# Altium PCB MAGIsCoCore.PcbDoc
Units mil, origin at the board's own origin, x right, y up, seen from the top; angles counter-clockwise.
Board outline 6000 x 4000 mil, 2 copper layers (Top Layer, Bottom Layer); 7 components, 24 nets, 58 pads, 14 vias.
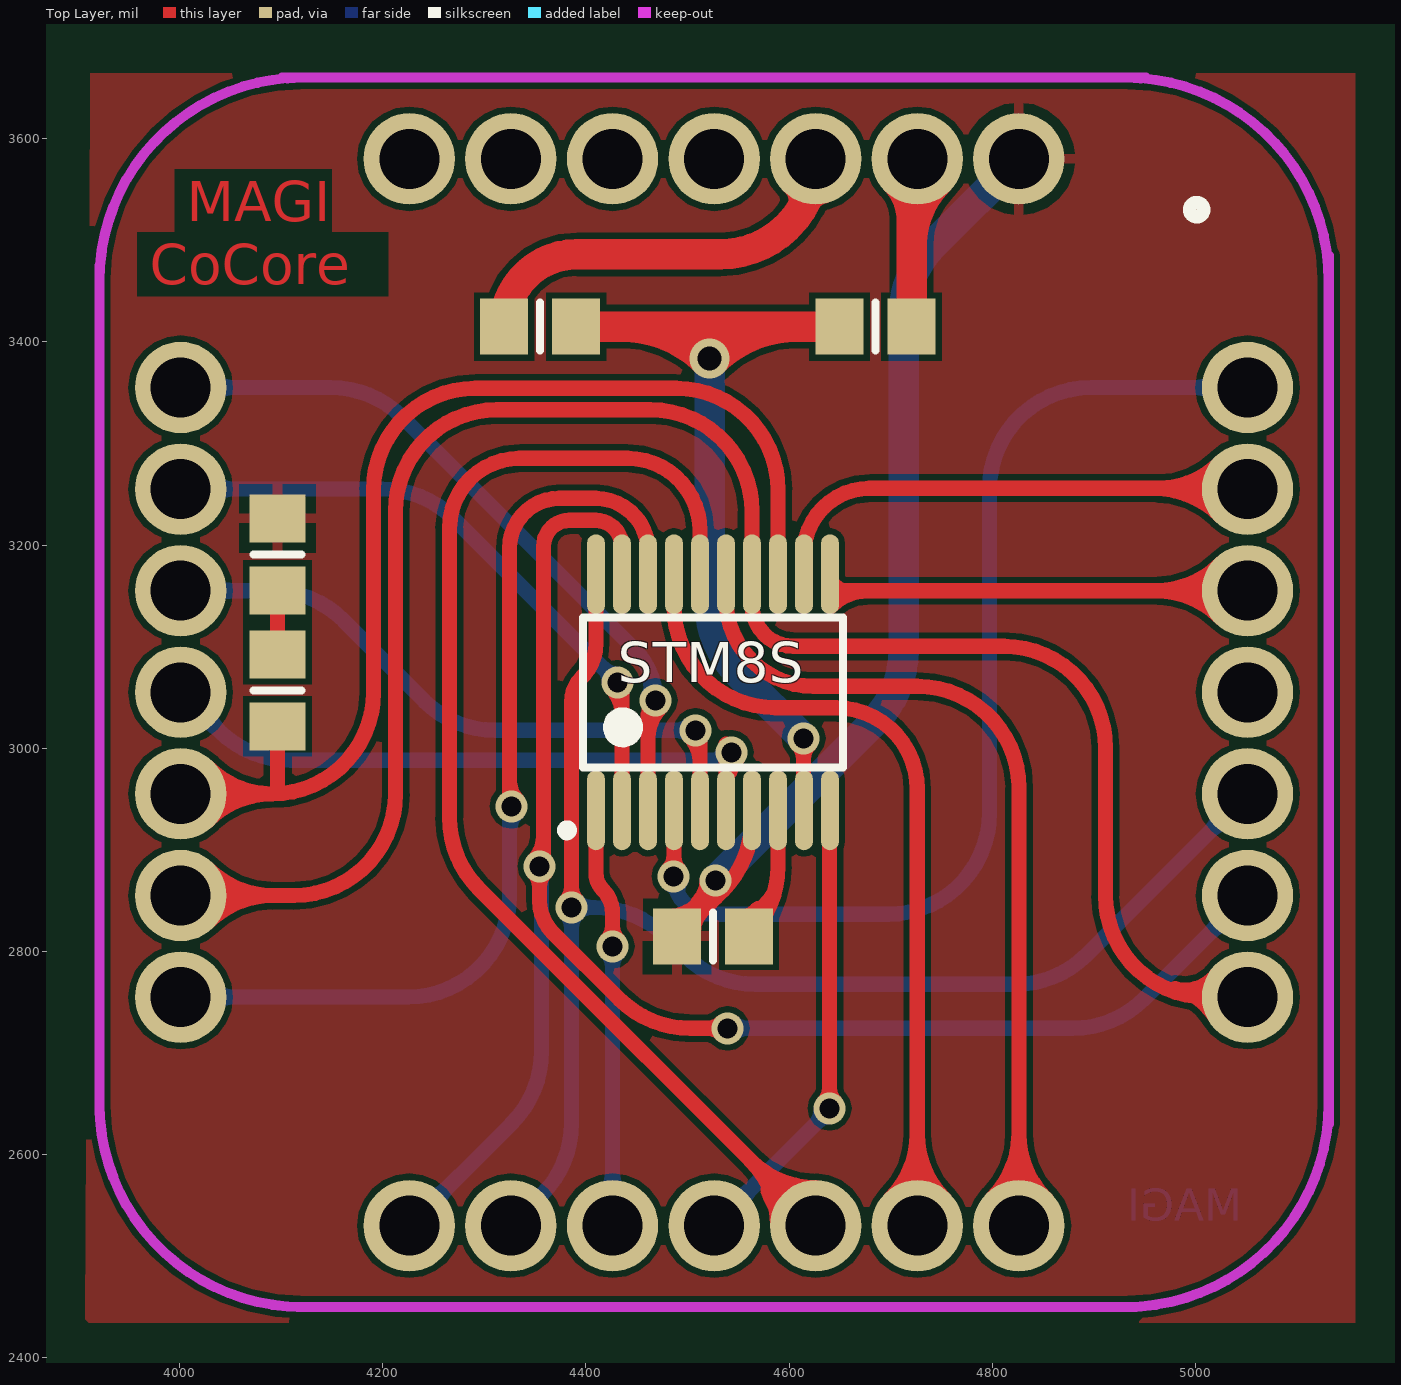
[diagram p0: Top Layer view]
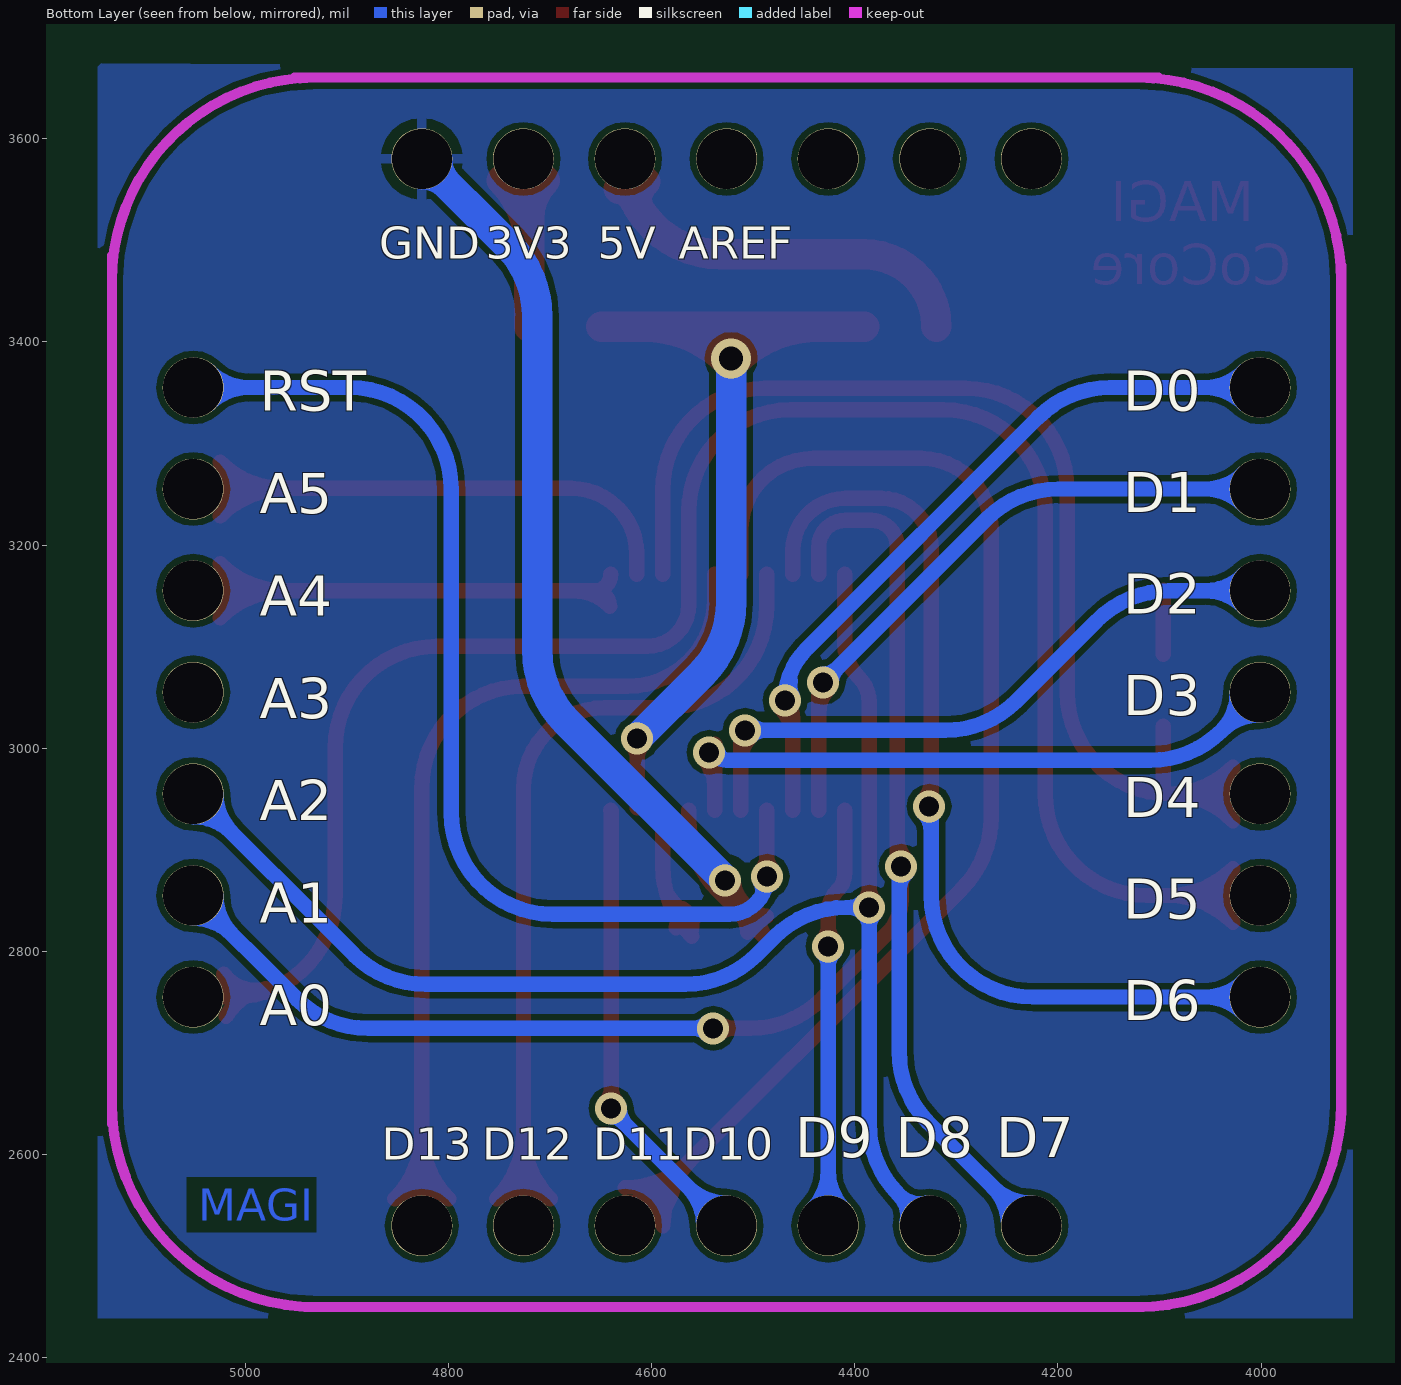
[diagram p1: Bottom Layer view, seen from below]

## Layer stack, top to bottom
Top Solder: solder mask 0.4, Solder Resist, Dk 3.5
Top Layer: signal copper 1.4
Dielectric 1: dielectric 12.6, FR-4, Dk 4.8
Bottom Layer: signal copper 1.4
Bottom Solder: solder mask 0.4, Solder Resist, Dk 3.5

## Board outline
1000,1000 7000,1000 7000,5000 1000,5000

## Design rules (kind name [scope] priority, off if disabled: settings)
Clearance [All] p1: gap=6
PolygonConnect [All] p1: connectstyle=Relief reliefconductorwidth=10 reliefentries=4 polygonreliefangle="90 Angle" airgapwidth=10
RoutingVias [All] p1: holewidth=280 width=500 viastyle="Through Hole" minholewidth=12 minwidth=24 maxholewidth=28 maxwidth=50
SolderMaskExpansion [All] p1: expansion=4
Width [All] p1: maxlimit=100 minlimit=6 preferedwidth=30
29 further rules are at their usual default settings.

## Classes and differential pairs
component class MAGIsCoCore: C4 J1 R2 R3 U1

## Components (designator, comment, footprint, x,y, rotation, side; value= is the part's Value field where it differs from the comment)
C4 "CAP_1" 6-0805_N 4525,2815 r0 top
J1 "MAGI-M8" MAGI-M8 4526.14,3055.16 r0 top
LED3 "LED_3" 6-0805_N 4096.46,3190.94 r90 top
R2 "000" 6-0805_n 4685,3415 r180 top
R3 "000" 6-0805_n 4355,3415 r180 top
R8 "RES1_1" 6-0805_N 4096.46,3057.09 r270 top
U1 "STM8S003F3" STM8S003F3 4525,3055.16 r90 top

## Footprints (in the part's own frame and the unit in brackets; to place one, negate y for a bottom-side part, rotate by r counter-clockwise, add the part's x,y. Pads: shape width x height; smd on the part's side, far side on the other; paste and mask are expansions set on the pad)
6-0805_N [mm] "Chip Resistor, Body 2.0x1.2mm, IPC Medium Density"
  rect 1.2x1.4 smd: 1(-0.9,0) 2(0.9,0)
  silkscreen extent 0,-0.6 0,0.6, body extent -1.07,-0.7 1.07,0.7, height 0.7
6-0805_n [mm] "Chip Resistor, Body 2.0x1.2mm, IPC Medium Density"
  rect 1.2x1.4 smd: 1(-0.9,0) 2(0.9,0)
  silkscreen extent 0,-0.6 0,0.6, body extent -1.07,-0.7 1.07,0.7, height 0.7
MAGI-M8 [mil]
  round 90 / inner round 90 / far side round 60 hole 59.06: 1(300,525) 2(200,525) 3(100,525) 4(0,525) 5(-100,525) 6(-200,525) 7(-300,525) 8(-525,300) 9(-525,200) 10(-525,100) 11(-525,0) 12(-525,-100) 13(-525,-200) 14(-525,-300) 15(-300,-525) 16(-200,-525) 17(-100,-525) 18(0,-525) 19(100,-525) 20(200,-525) 21(300,-525) 22(525,-300) 23(525,-200) 24(525,-100) 25(525,0) 26(525,100) 27(525,200) 28(525,300)
  Keep-Out Layer lines w10: -605,-415 -605,290 -605,420 ; -605,-405 ccw(c-405,-405) -405,-605 ; -605,405 cw(c-405,405) -405,605 ; -425,605 425,605 ; -410,-605 415,-605 ; 405,-605 ccw(c405,-405) 605,-405 ; 405,605 cw(c405,405) 605,405 ; 605,-425 605,430
  silkscreen extent 468,468 482,482
STM8S003F3 [mm]
  oval 2x0.45 smd: 1(-2.95,2.925) 2(-2.95,2.275) 3(-2.95,1.625) 4(-2.95,0.975) 5(-2.95,0.325) 6(-2.95,-0.325) 7(-2.95,-0.975) 8(-2.95,-1.625) 9(-2.95,-2.275) 10(-2.95,-2.925) 11(2.95,-2.925) 12(2.95,-2.275) 13(2.95,-1.625) 14(2.95,-0.975) 15(2.95,-0.325) 16(2.95,0.325) 17(2.95,0.975) 18(2.95,1.625) 19(2.95,2.275) 20(2.95,2.925)
  silkscreen extent -3.57,-3.25 1.88,3.77

## Part data
C4: "Capacitor"
R2 R3: library part RES1

## Via types
v1: diameter 31.5, hole 19.68, Top Layer to Bottom Layer, 13 vias
v2: diameter 39.37, hole 23.62, Top Layer to Bottom Layer, 1 vias

## Nets (pads, with @x,y where several pads share a name; then routed paths per layer and width w, separated by ;. In a path a pad name is that pad's centre, name@x,y a point inside that pad or via, vN(x,y) a via of type N, cw(c..) or ccw(c..) an arc to the next point about the centre after c; other vN are vias at no path point)
3.3V: J1.2 R2.1 | length 396
  Top Layer w30: R2.1 4720.43,3574.45 cw(c4726.14,3574.45) J1.2 ; J1.2@4704.93,3558.94 cw(c4667.5,3521.51) 4720.43,3521.51 ccw(c4667.5,3521.51) J1.2@4704.93,3558.94 ; 4720.43,3493.95 cw(c4812.35,3493.95) 4747.35,3558.94 ccw(c4812.35,3493.95) 4720.43,3493.95
5V: J1.3 R3.2 | length 508.8
  Top Layer w30: R3.2 cw(c4390.79,3415) 4390.79,3486.22 4532.2,3486.22 ccw(c4532.2,3580.16) J1.3 ; 4613.56,3533.19 ccw(c4589.98,3539.51) 4606.2,3557.74 cw(c4589.98,3539.51) 4613.56,3533.19 ; 4613.56,3533.19 cw(c4637.13,3526.87) 4632.2,3550.78 ccw(c4637.13,3526.87) 4613.56,3533.19
A0: J1.13 J1.22 U1.14 | length 2580.6
  Top Layer w15: J1.13 4112.53,2855.16 ccw(c4112.53,2955.16) 4212.53,2955.16 4212.53,3233.33 cw(c4312.53,3233.33) 4312.53,3333.33 4463.39,3333.33 cw(c4463.39,3233.33) 4563.39,3233.33 U1.14 4563.39,3141.34 ccw(c4604.33,3141.34) 4604.33,3100.39 4811.42,3100.39 cw(c4811.42,3000.39) 4911.42,3000.39 4911.42,2855.16 ccw(c5011.42,2855.16) 5011.42,2755.16 J1.22 ; 4055.46,2855.16 ccw(c4055.46,2800.84) 4017.05,2839.25 cw(c4055.46,2800.84) 4055.46,2855.16 ; 4055.46,2855.16 cw(c4055.46,2909.48) 4017.05,2871.07 ccw(c4055.46,2909.48) 4055.46,2855.16 ; 4091.67,2855.16 ccw(c4091.67,2764.62) 4027.66,2828.64 cw(c4091.67,2764.62) 4091.67,2855.16 ; 4091.67,2855.16 cw(c4091.67,2945.69) 4027.66,2881.67 ccw(c4091.67,2945.69) 4091.67,2855.16 ; 4980.11,2763.29 ccw(c4989.92,2801.05) 5021.14,2777.65 cw(c4989.92,2801.05) 4980.11,2763.29 ; 4984.34,2762.19 cw(c4970.15,2707.56) 5018.81,2736.16 ccw(c4970.15,2707.56) 4984.34,2762.19 ; 5001.75,2757.67 ccw(c5009.26,2786.56) 5033.14,2768.65 cw(c5009.26,2786.56) 5001.75,2757.67
A1: J1.15 J1.23 U1.19 | length 2149.1
  Top Layer w15: v1(4354.33,2883.86) 4354.33,2850.44 ccw(c4399.65,2850.44) 4367.61,2818.39 4432.3,2753.7 ccw(c4503.01,2824.41) 4503.01,2724.41 v1(4539.37,2724.41) ; v1@4356.3,2881.89 4358.27,2883.86 4358.27,3198.82 cw(c4383.86,3198.82) 4383.86,3224.41 4409.45,3224.41 cw(c4409.45,3198.43) 4435.43,3198.43 U1.19 ; 4354.33,2863.95 ccw(c4334.42,2863.95) 4348.5,2878.03 cw(c4334.42,2863.95) 4354.33,2863.95 ; 4354.33,2863.95 cw(c4374.24,2863.95) 4360.16,2878.03 ccw(c4374.24,2863.95) 4354.33,2863.95 ; 4519.46,2724.41 ccw(c4519.46,2744.32) 4533.54,2730.24 cw(c4519.46,2744.32) 4519.46,2724.41 ; 4519.46,2724.41 cw(c4519.46,2704.5) 4533.54,2718.58 ccw(c4519.46,2704.5) 4519.46,2724.41 ; v1@4348.5,2889.69 ccw(c4324.91,2913.28) 4358.27,2913.28 cw(c4324.91,2913.28) v1@4348.5,2889.69
  Bottom Layer w15: J1.15 4327.01,2631.03 ccw(c4256.3,2701.74) 4356.3,2701.74 4356.3,2881.89 4358.27,2883.86 v1(4354.33,2883.86) ; J1.15@4226.14,2552.66 ccw(c4226.14,2606.98) 4264.55,2568.57 ccw(c4302.96,2530.16) J1.15@4248.64,2530.16 ; v1(4539.37,2724.41) 4878.97,2724.41 ccw(c4878.97,2824.41) 4949.68,2753.7 J1.23 ; J1.23@5028.64,2855.16 cw(c4974.32,2855.16) 5012.73,2816.75 cw(c5051.14,2778.34) J1.23@5051.14,2832.66 ; 4559.28,2724.41 ccw(c4559.28,2704.5) 4545.2,2718.58 cw(c4559.28,2704.5) 4559.28,2724.41 ; 4559.28,2724.41 cw(c4559.28,2744.32) 4545.2,2730.24 ccw(c4559.28,2744.32) 4559.28,2724.41 ; v1@4348.5,2878.03 cw(c4329.67,2859.19) 4356.3,2859.19 ccw(c4329.67,2859.19) v1@4348.5,2878.03
A2: J1.16 J1.24 U1.20 | length 1759.9
  Top Layer w15: v1(4385.83,2843.47) 4385.83,3045.39 cw(c4420.48,3045.39) 4395.98,3069.9 ccw(c4362.5,3103.37) 4401.87,3077.08 ccw(c4362.5,3103.37) 4409.84,3103.37 U1.20 ; 4385.83,2863.39 ccw(c4405.74,2863.39) 4391.66,2849.31 cw(c4405.74,2863.39) 4385.83,2863.39 ; 4385.83,2863.39 cw(c4365.91,2863.39) 4379.99,2849.31 ccw(c4365.91,2863.39) 4385.83,2863.39
  Bottom Layer w15: J1.16 4356.54,2560.55 ; J1.16@4330.15,2552.3 ccw(c4335.46,2581.63) 4356.54,2560.55 ; J1.16@4348.28,2534.16 cw(c4377.61,2539.47) 4356.54,2560.55 ; J1.24@5028.64,2955.16 cw(c4974.32,2955.16) 5012.73,2916.75 cw(c5051.14,2878.34) J1.24@5051.14,2932.66 ; J1.24 4892.99,2797.01 cw(c4822.28,2867.72) 4822.28,2767.72 4567.01,2767.72 cw(c4567.01,2867.72) 4496.3,2797.01 4479.12,2814.19 ccw(c4408.41,2743.47) 4408.41,2843.47 v1(4385.83,2843.47) 4385.83,2631.26 cw(c4285.83,2631.26) 4356.54,2560.55 ; 4385.83,2823.56 ccw(c4365.91,2823.56) 4379.99,2837.64 cw(c4365.91,2823.56) 4385.83,2823.56 ; 4385.83,2823.56 cw(c4405.74,2823.56) v1@4391.66,2837.64 ; 4385.83,2823.56 cw(c4405.74,2823.56) v1@4391.66,2837.64 ; v1@4391.66,2837.64 cw(c4405.74,2823.56) 4405.74,2843.47 ; v1@4391.66,2837.64 cw(c4405.74,2823.56) 4405.74,2843.47 ; 4405.74,2843.47 cw(c4405.74,2863.39) 4391.66,2849.31 ccw(c4405.74,2863.39) 4405.74,2843.47
A3: J1.25
A4: J1.26 U1.11 | length 1003.2
  Top Layer w15: U1.11 ccw(c4656.3,3171.3) 4656.3,3155.16 ; J1.26 4656.3,3155.16 ; 4656.3,3155.16 ccw(c4656.3,3140.37) 4641.52,3140.75 cw(c4656.3,3140.37) 4656.3,3155.16 ; 4960.61,3155.16 ccw(c4960.61,3245.69) 5024.63,3181.67 cw(c4960.61,3245.69) 4960.61,3155.16 ; 4960.61,3155.16 cw(c4960.61,3064.62) 5024.63,3128.64 ccw(c4960.61,3064.62) 4960.61,3155.16 ; 4996.82,3155.16 ccw(c4996.82,3209.48) 5035.23,3171.07 cw(c4996.82,3209.48) 4996.82,3155.16 ; 4996.82,3155.16 cw(c4996.82,3100.84) 5035.23,3139.25 ccw(c4996.82,3100.84) 4996.82,3155.16 ; U1.11@4641.12,3139.83 cw(c4678.13,3102.82) 4678.13,3155.16 ccw(c4678.13,3102.82) U1.11@4641.12,3139.83
A5: J1.27 U1.12 | length 949
  Top Layer w15: U1.12 4614.57,3191.34 cw(c4679.13,3191.34) 4679.13,3255.91 5050.39,3255.91 cw(c5050.39,3255.16) J1.27 ; 4958.8,3255.91 cw(c4958.8,3162.82) 5024.63,3228.64 ccw(c4958.8,3162.82) 4958.8,3255.91 ; 4962.41,3255.91 ccw(c4962.41,3343.88) 5024.63,3281.67 cw(c4962.41,3343.88) 4962.41,3255.91 ; 4995.02,3255.91 cw(c4995.02,3199.03) 5035.23,3239.25 ccw(c4995.02,3199.03) 4995.02,3255.91 ; 4998.63,3255.91 ccw(c4998.63,3307.67) 5035.23,3271.07 cw(c4998.63,3307.67) 4998.63,3255.91
D0: J1.8 U1.3 | length 965.7
  Top Layer w15: U1.3 4461.02,3029.27 cw(c4486.43,3029.27) v1(4468.47,3047.24) ; 4461.02,3009.36 cw(c4506.34,3009.36) 4474.3,3041.41 ccw(c4506.34,3009.36) 4461.02,3009.36 ; 4461.02,3027.79 cw(c4472.67,3027.79) 4470.21,3039.18 ccw(c4472.67,3027.79) 4461.02,3027.79
  Bottom Layer w15: J1.8 4148.7,3355.16 cw(c4148.7,3255.16) 4219.41,3325.87 4447.55,3097.72 cw(c4397.07,3047.24) v1(4468.47,3047.24) ; J1.8@4017.05,3339.25 cw(c4055.46,3300.84) 4055.46,3355.16 cw(c4055.46,3409.48) J1.8@4017.05,3371.07 ; 4463.31,3066.47 ccw(c4482.55,3071.63) 4472.59,3054.38 cw(c4482.55,3071.63) 4463.31,3066.47 ; 4463.31,3066.47 cw(c4444.08,3061.32) 4461.32,3051.36 ccw(c4444.08,3061.32) 4463.31,3066.47
D1: J1.9 U1.2 | length 833.9
  Top Layer w15: v1(4431.1,3064.96) cw(c4420.65,3054.51) 4435.43,3054.51 U1.2 ; v1@4425.27,3059.13 cw(c4400.73,3034.59) 4435.43,3034.59 ccw(c4400.73,3034.59) v1@4425.27,3059.13
  Bottom Layer w15: J1.9 4199.48,3255.16 cw(c4199.48,3155.16) 4270.19,3225.87 v1(4431.1,3064.96) ; J1.9@4017.05,3239.25 cw(c4055.46,3200.84) 4055.46,3255.16 cw(c4055.46,3309.48) J1.9@4017.05,3271.07 ; 4417.02,3079.04 ccw(c4431.1,3093.12) 4431.1,3073.21 cw(c4431.1,3093.12) 4417.02,3079.04 ; 4417.02,3079.04 cw(c4402.94,3064.96) 4422.85,3064.96 ccw(c4402.94,3064.96) 4417.02,3079.04
D2: J1.10 U1.5 | length 843.3
  Top Layer w15: v1(4507.86,3017.71) 4507.86,3007.87 4509.84,3009.84 4512.2,3009.84 U1.5 ; v1@4502.03,3011.88 cw(c4477.48,2987.32) 4512.2,2987.32 ccw(c4477.48,2987.32) v1@4502.03,3011.88
  Bottom Layer w15: J1.10 4090.82,3155.16 cw(c4090.82,3055.16) 4161.53,3125.87 4240.4,3047 ccw(c4311.11,3117.71) 4311.11,3017.71 v1(4507.86,3017.71) ; J1.10@4017.05,3139.25 cw(c4055.46,3100.84) 4055.46,3155.16 cw(c4055.46,3209.48) J1.10@4017.05,3171.07 ; 4487.95,3017.71 ccw(c4487.95,3037.62) 4502.03,3023.54 cw(c4487.95,3037.62) 4487.95,3017.71 ; 4487.95,3017.71 cw(c4487.95,2997.8) 4502.03,3011.88 ccw(c4487.95,2997.8) 4487.95,3017.71
D3: J1.11 U1.6 | length 830.3
  Top Layer w15: U1.6 v1@4537.8,3004.33 ; v1@4538.62,2989.27 cw(c4533.29,2981.55) U1.6@4541.41,2976.86 ; v1@4540.66,2999.33 4540.66,2998.69 v1(4543.3,2996.06) ; U1.6@4537.8,2962.86 cw(c4576.5,2962.86) 4549.13,2990.22 ccw(c4576.5,2962.86) U1.6@4537.8,2962.86
  Bottom Layer w15: J1.11 4038.82,3017.48 ; J1.11@4001.45,3032.66 cw(c4002.16,2980.82) 4038.82,3017.48 ; J1.11@4023.64,3054.85 ccw(c4075.48,3054.14) 4038.82,3017.48 ; v1@4540.66,2999.33 4540.66,2998.69 v1(4543.3,2996.06) cw(c4524.3,3015.05) 4524.3,2988.19 ; 4038.82,3017.48 ccw(c4109.53,3088.19) 4109.53,2988.19 4524.3,2988.19 ; 4524.3,2988.19 ccw(c4524.3,2999.19) 4535.16,2997.4 cw(c4524.3,2999.19) 4524.3,2988.19
D4: J1.12 R8.2 U1.13 | length 1556.9
  Top Layer w15: J1.12 4090.94,2955.16 ; 4096.46,2955.46 R8.2 ; U1.13 4588.98,3254.33 ccw(c4488.98,3254.33) 4488.98,3354.33 4290.94,3354.33 ccw(c4290.94,3254.33) 4190.94,3254.33 4190.94,3055.16 cw(c4090.94,3055.16) 4090.94,2955.16 ; 4055.02,2955.16 ccw(c4055.02,2901.9) 4017.14,2939.34 cw(c4055.02,2901.9) 4055.02,2955.16 ; 4055.02,2955.16 cw(c4055.02,3008.42) 4017.14,2970.98 ccw(c4055.02,3008.42) 4055.02,2955.16 ; 4090.94,2955.16 ccw(c4090.94,2866.39) 4027.81,2928.79 cw(c4090.94,2866.39) 4090.94,2955.16 ; 4090.94,2955.16 cw(c4090.94,3043.92) 4027.81,2981.52 ccw(c4090.94,3043.92) 4090.94,2955.16
D6: J1.14 U1.18 | length 1112.3
  Top Layer w15: v1(4326.77,2942.91) 4324.8,2942.91 4324.8,3196.85 cw(c4374.02,3196.85) 4374.02,3246.06 4409.45,3246.06 cw(c4409.45,3194.49) 4461.02,3194.49 U1.18 ; 4324.8,2967.58 ccw(c4351.44,2967.58) 4332.6,2948.75 cw(c4351.44,2967.58) 4324.8,2967.58
  Bottom Layer w15: J1.14 4224.8,2755.16 ccw(c4224.8,2855.16) 4324.8,2855.16 4324.8,2942.91 v1(4326.77,2942.91) ; J1.14@4017.05,2739.25 cw(c4055.46,2700.84) 4055.46,2755.16 cw(c4055.46,2809.48) J1.14@4017.05,2771.07 ; 4324.8,2918.25 cw(c4351.44,2918.25) 4332.6,2937.08 ccw(c4351.44,2918.25) 4324.8,2918.25
D9: J1.17 U1.1 | length 623.7
  Top Layer w15: U1.1 4409.84,2877.13 ccw(c4432.83,2877.13) 4416.57,2860.87 cw(c4393.48,2837.78) 4423.64,2850.3 cw(c4393.48,2837.78) 4426.14,2837.78 v1(4426.14,2805.12) ; 4426.14,2825.03 ccw(c4446.05,2825.03) 4431.97,2810.95 cw(c4446.05,2825.03) 4426.14,2825.03 ; 4426.14,2825.03 cw(c4406.23,2825.03) 4420.31,2810.95 ccw(c4406.23,2825.03) 4426.14,2825.03
  Bottom Layer w15: J1.17@4410.23,2546.07 ccw(c4371.82,2584.48) 4426.14,2584.48 ccw(c4480.46,2584.48) J1.17@4442.05,2546.07 ; J1.17 v1(4426.14,2805.12) ; 4426.14,2785.21 ccw(c4406.23,2785.21) 4420.31,2799.29 cw(c4406.23,2785.21) 4426.14,2785.21 ; 4426.14,2785.21 cw(c4446.05,2785.21) 4431.97,2799.29 ccw(c4446.05,2785.21) 4426.14,2785.21
D10: J1.18 U1.10 | length 666.3
  Top Layer w15: v1(4639.76,2645.67) 4639.76,2938.07 cw(c4641.11,2938.07) U1.10 ; 4639.76,2665.58 ccw(c4659.68,2665.58) 4645.6,2651.5 cw(c4659.68,2665.58) 4639.76,2665.58 ; 4639.76,2665.58 cw(c4619.85,2665.58) 4633.93,2651.5 ccw(c4619.85,2665.58) 4639.76,2665.58
  Bottom Layer w15: J1.18 4638.43,2642.44 ccw(c4635.2,2645.67) v1(4639.76,2645.67) ; J1.18@4526.14,2552.66 ccw(c4526.14,2606.98) 4564.55,2568.57 ccw(c4602.96,2530.16) J1.18@4548.64,2530.16 ; 4624.35,2628.36 ccw(c4607.04,2645.67) 4631.52,2645.67 cw(c4607.04,2645.67) 4624.35,2628.36 ; 4628.91,2632.93 cw(c4639.76,2622.07) 4639.76,2637.42 ccw(c4639.76,2622.07) 4628.91,2632.93
D11: J1.19 U1.16 | length 1721.6
  Top Layer w15: U1.16 4512.2,3214.17 ccw(c4440.94,3214.17) 4440.94,3285.43 4334.65,3285.43 ccw(c4334.65,3216.54) 4265.75,3216.54 4265.75,2931.97 ccw(c4365.75,2931.97) 4295.04,2861.26 J1.19 ; 4579.12,2565.68 ccw(c4636.57,2581.07) J1.19@4624.64,2522.81 ; 4562.13,2594.17 ccw(c4626.14,2658.19) 4626.14,2567.66 cw(c4626.14,2658.19) 4562.13,2594.17 ; 4562.13,2594.17 cw(c4498.11,2530.16) 4588.64,2530.16 ccw(c4498.11,2530.16) 4562.13,2594.17 ; 4587.73,2568.57 ccw(c4626.14,2606.98) 4626.14,2552.66 cw(c4626.14,2606.98) 4587.73,2568.57 ; 4587.73,2568.57 cw(c4549.32,2530.16) 4603.64,2530.16 ccw(c4549.32,2530.16) 4587.73,2568.57
D12: J1.20 U1.17 | length 1258.4
  Top Layer w15: U1.17 4486.61,3140.02 ccw(c4586.61,3140.02) 4586.61,3040.02 4645.99,3040.02 cw(c4645.99,2959.87) 4726.14,2959.87 J1.20 ; 4726.14,2584.48 ccw(c4780.46,2584.48) 4742.05,2546.07 cw(c4780.46,2584.48) 4726.14,2584.48 ; 4726.14,2584.48 cw(c4671.82,2584.48) 4710.23,2546.07 ccw(c4671.82,2584.48) 4726.14,2584.48 ; 4726.14,2620.69 ccw(c4816.67,2620.69) 4752.66,2556.67 cw(c4816.67,2620.69) 4726.14,2620.69 ; 4726.14,2620.69 cw(c4635.61,2620.69) 4699.63,2556.67 ccw(c4635.61,2620.69) 4726.14,2620.69
D13: J1.21 U1.15 | length 1304.6
  Top Layer w15: U1.15 4537.8,3147.24 ccw(c4624.02,3147.24) 4624.02,3061.02 4660.54,3061.02 4726.14,3061.02 cw(c4726.14,2961.02) 4826.14,2961.02 J1.21 ; 4826.14,2584.48 ccw(c4880.46,2584.48) 4842.05,2546.07 cw(c4880.46,2584.48) 4826.14,2584.48 ; 4826.14,2584.48 cw(c4771.82,2584.48) 4810.23,2546.07 ccw(c4771.82,2584.48) 4826.14,2584.48 ; 4826.14,2620.69 ccw(c4916.67,2620.69) 4852.66,2556.67 cw(c4916.67,2620.69) 4826.14,2620.69 ; 4826.14,2620.69 cw(c4735.61,2620.69) 4799.63,2556.67 ccw(c4735.61,2620.69) 4826.14,2620.69
GND: C4.1 J1.1 LED3.2 U1.7 | length 1439.1
  Top Layer w15: C4.1@4486.78,2834.82 ccw(c4478.72,2880.68) v1@4519.04,2857.4 ; C4.1 4534.1,2859.53 ccw(c4463.39,2930.24) 4563.39,2930.24 U1.7 ; C4.1@4490.64,2818.62 cw(c4522.8,2809.3) 4514.14,2841.64 ; C4.1@4505.14,2823.11 cw(c4521.96,2827.62) C4.1@4506.88,2836.33 ; C4.1@4509.73,2834.33 cw(c4555.24,2822.13) v1@4531.68,2862.94 ; 4510.53,2848.88 ccw(c4489.34,2870.08) v1@4519.31,2870.08 ; v1@4519.31,2870.08 cw(c4458.15,2870.08) 4501.4,2826.83 ccw(c4458.15,2870.08) v1@4519.31,2870.08 ; C4.1@4489.57,2835.06 ccw(c4489.57,2883.49) 4523.81,2849.24 cw(c4489.57,2883.49) C4.1@4489.57,2835.06 ; C4.1@4505.69,2818.94 cw(c4535.11,2818.94) 4514.31,2839.74 ccw(c4535.11,2818.94) C4.1@4505.69,2818.94 ; 4527,2852.44 ccw(c4509.36,2870.08) 4534.31,2870.08 cw(c4509.36,2870.08) 4527,2852.44
  Bottom Layer w30: v1(4527.56,2870.08) 4683.31,3025.83 ccw(c4612.6,3096.54) 4712.6,3096.54 4712.6,3425.19 cw(c4812.6,3425.19) 4741.89,3495.9 J1.1 ; J1.1@4811.14,3580.16 cw(c4774.93,3580.16) 4800.54,3554.55 cw(c4826.14,3528.94) J1.1@4826.14,3565.16
NetC4_2: C4.2 U1.8 | length 280.2
  Top Layer w15: C4.2 ccw(c4491.52,2883.91) 4588.98,2883.91 U1.8 ; C4.2@4561.48,2819.35 cw(c4578.66,2826.12) C4.2@4569.43,2842.11 ; C4.2@4556.26,2834.51 ccw(c4544.45,2878.6) 4583.98,2855.78 cw(c4544.45,2878.6) C4.2@4556.26,2834.51 ; C4.2@4576.01,2823.11 cw(c4607.11,2831.44) 4579.22,2847.54 ccw(c4607.11,2831.44) C4.2@4576.01,2823.11
NetLED3_1: LED3.1 R8.1 | length 63
  Top Layer w15: R8.1 LED3.1
RST: J1.28 U1.4 | length 1291.9
  Top Layer w15: v1(4486.22,2874.02) 4486.61,2874.41 U1.4 ; v1@4480.39,2879.85 ccw(c4465.36,2894.88) 4486.61,2894.88 cw(c4465.36,2894.88) v1@4480.39,2879.85 ; 4486.61,2892.98 ccw(c4505.18,2892.98) 4492.05,2879.85 cw(c4505.18,2892.98) 4486.61,2892.98
  Bottom Layer w15: v1(4486.22,2874.02) ccw(c4523.62,2874.02) 4523.62,2836.61 4697.24,2836.61 ccw(c4697.24,2936.61) 4797.24,2936.61 4797.24,3255.16 cw(c4897.24,3255.16) 4897.24,3355.16 J1.28 ; J1.28@5035.23,3339.25 ccw(c4996.82,3300.84) 4996.82,3355.16 ccw(c4996.82,3409.48) J1.28@5035.23,3371.07 ; 4491.23,2855.32 ccw(c4473.27,2850.5) 4482.24,2866.79 cw(c4473.27,2850.5) 4491.23,2855.32 ; 4491.23,2855.32 cw(c4509.19,2860.13) 4493.28,2869.75 ccw(c4509.19,2860.13) 4491.23,2855.32
VCC: R2.2 R3.1 U1.9 | length 1198.9
  Top Layer w15: U1.9@4614.17,2941.38 v1(4614.17,3009.84) ; 4614.17,2989.93 ccw(c4594.26,2989.93) 4608.34,3004.01 cw(c4594.26,2989.93) 4614.17,2989.93 ; 4614.17,2989.93 cw(c4634.09,2989.93) 4620.01,3004.01 ccw(c4634.09,2989.93) 4614.17,2989.93
  Top Layer w30: R3.1 4521.65,3415 ; v2(4521.65,3383.86) 4521.65,3415 ; R2.2 4521.65,3415 ; 4435.16,3415 cw(c4435.16,3297.37) 4518.34,3380.55 ccw(c4435.16,3297.37) 4435.16,3415 ; v2@4524.97,3380.55 cw(c4608.15,3297.37) 4608.15,3415 ccw(c4608.15,3297.37) v2@4524.97,3380.55
  Bottom Layer w30: v2(4521.65,3383.86) 4521.65,3143.78 ccw(c4621.65,3143.78) 4550.94,3073.07 v1(4614.17,3009.84)
pads on no net: J1.4 J1.5 J1.6 J1.7

## Polygon pours and split planes (outlines as drawn)
GND on Bottom Layer "Bottom Layer-No Net" (solid, pour order 3): 3909.98,3669.2 3909.98,2439.2 5144.98,2439.2 5144.98,3674.2
GND on Top Layer "Bottom Layer-No Net" (solid, pour order 5): 3912.28,3664.58 5147.28,3664.58 5157.28,3664.58 5157.28,2434.58 3907.28,2434.58

## Other copper
Top Layer:
  text "MAGI" at 4006.93,3518.62 h39.37
  text "CoCore" at 3970.47,3456.69 h39.37

## Silkscreen, mask and mechanical layers (free items; w line width, h text height)
Top Overlay:
  text "STM8S" at 4431.1,3064.96 h39.37
Bottom Overlay:
  text "AREF" at 4573.19,3481.97 h31.5
  text "5V" at 4653.19,3481.97 h31.5
  text "3V3" at 4763.19,3481.97 h31.5
  text "GND" at 4868.19,3481.97 h31.5
  text "D0" at 4135.79,3332.36 h39.37
  text "RST" at 4985.79,3332.36 h39.37
  text "D1" at 4135.79,3232.36 h39.37
  text "A5" at 4985.79,3231.53 h39.37
  text "D2" at 4135.79,3132.36 h39.37
  text "A4" at 4985.79,3130.7 h39.37
  text "D3" at 4135.79,3032.36 h39.37
  text "A3" at 4985.79,3029.86 h39.37
  text "D4" at 4135.79,2932.36 h39.37
  text "A2" at 4985.79,2929.03 h39.37
  text "D5" at 4135.79,2832.36 h39.37
  text "A1" at 4985.79,2828.2 h39.37
  text "D6" at 4135.79,2732.36 h39.37
  text "A0" at 4985.79,2727.36 h39.37
  text "D7" at 4260.79,2597.36 h39.37
  text "D8" at 4359.79,2597.36 h39.37
  text "D9" at 4458.79,2597.36 h39.37
  text "D10" at 4568.78,2595.24 h31.5
  text "D11" at 4657.29,2595.24 h31.5
  text "D12" at 4766.79,2595.24 h31.5
  text "D13" at 4865.79,2595.24 h31.5

## Text inside footprints (layer, text, board x,y; h text height)
J1: Bottom Layer "MAGI" at 5046.14,2535.16 h31.5